# EAGLE board brick_i2c_rtc (EAGLE 7.4.0)
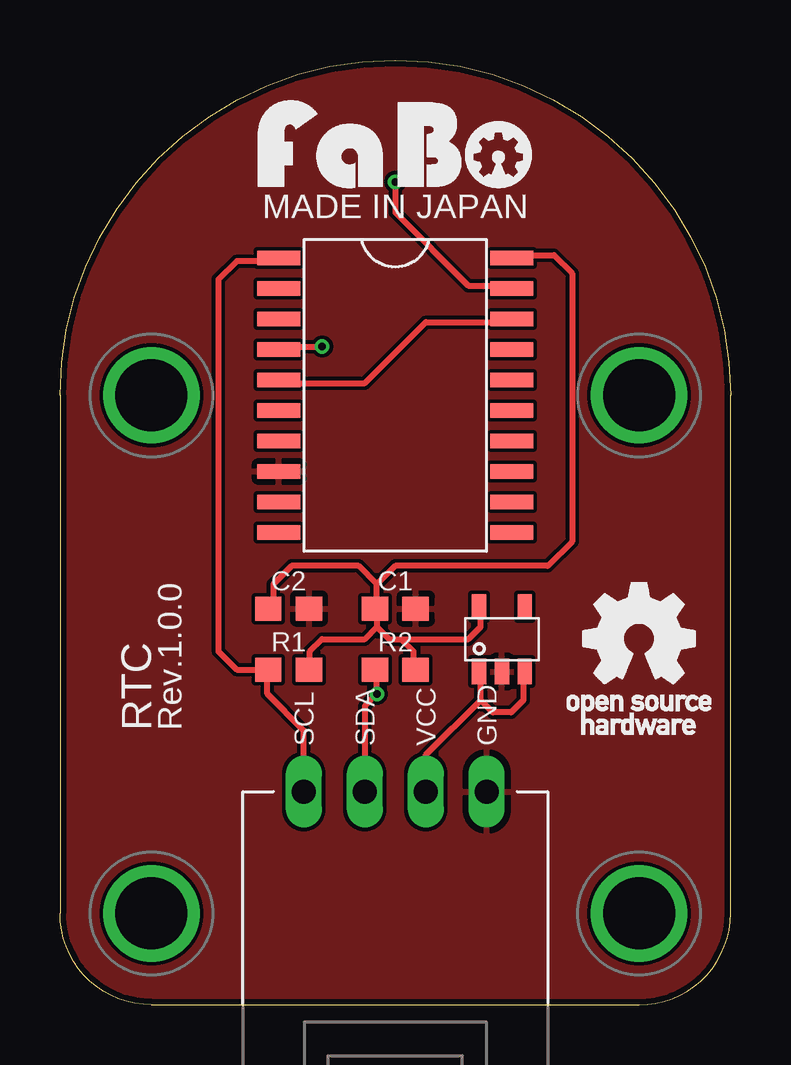
[diagram p0: board, top side]
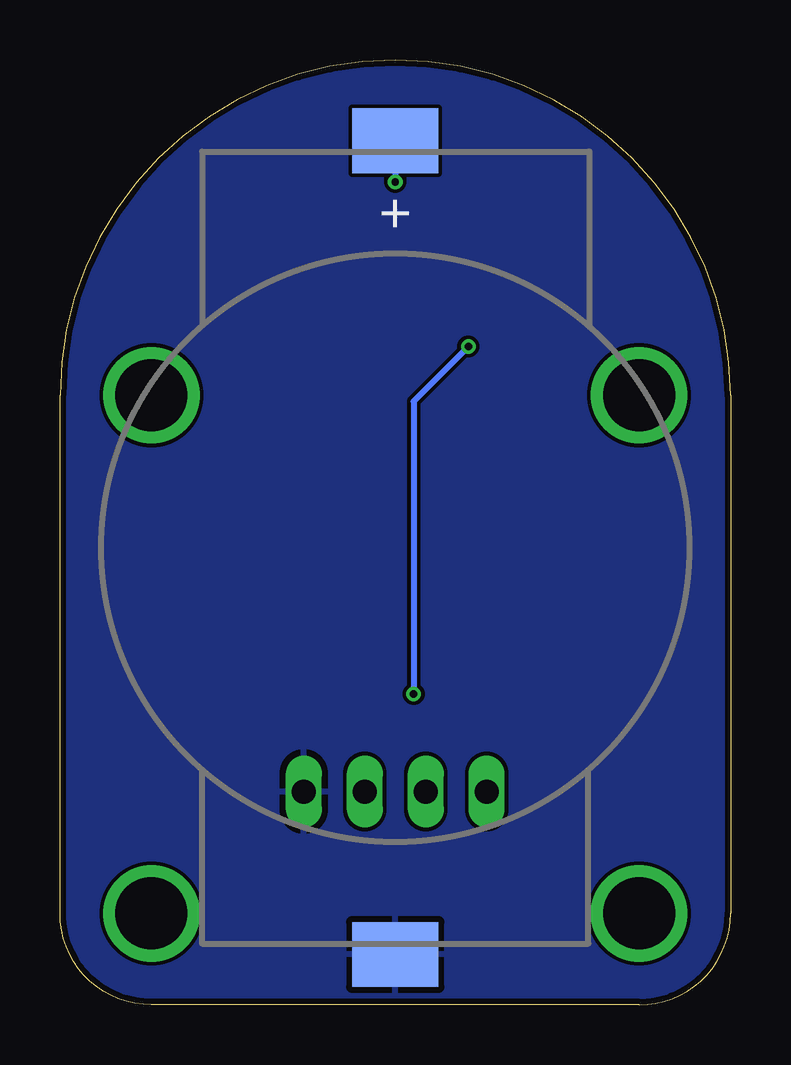
[diagram p1: board, bottom side, seen from below]

Size 27.94 x 39.37 mm. Coordinates in mm from the lower left corner, seen from the top.
Copper layers (1*16): Top 0.035mm / dielectric 1.5mm / Bottom 0.035mm
Design rules "Elecrow_2-layer_eagle_rule": minimum track width 6mil, minimum drill 12mil, track to track 6mil, track to pad 6mil, pad to pad 6mil, via to via 6mil, smd to smd 0mil, copper to edge 10mil, drill to drill 10mil, minimum pad ring 10mil, minimum via ring 6mil, stop-mask expansion 2mil, vias tented up to drill 100mil, thermal gap 10mil

## Footprints (pad centres in the part's own frame; a part is rotated, then mirrored left to right if it is on the bottom)
EIA0603 = smd 1.1 x 1: 1 -0.85,0; 2 0.85,0
SO20 = smd 1.8 x 0.6: 1 -4.85,5.715; 2 -4.85,4.445; 3 -4.85,3.175; 4 -4.85,1.905; 5 -4.85,0.635; 6 -4.85,-0.635; 7 -4.85,-1.905; 8 -4.85,-3.175; 9 -4.85,-4.445; 10 -4.85,-5.715; 11 4.85,-5.715; 12 4.85,-4.445; 13 4.85,-3.175; 14 4.85,-1.905; 15 4.85,-0.635; 16 4.85,0.635; 17 4.85,1.905; 18 4.85,3.175; 19 4.85,4.445; 20 4.85,5.715
TI-LP2985 = smd 0.6 x 1.05: 1 -0.95,-1.35; 2 0,-1.35; 3 0.95,-1.35; 4 0.95,1.35; 5 -0.95,1.35
FABO_BRICK_I2C = drill 1 long: GND 3.81,-10.16; SCL -3.81,-10.16; SDA -1.27,-10.16; VCC 1.27,-10.16 | drill 3 pad 3.81: P$1 -10.16,6.35; P$2 10.16,6.35; P$3 -10.16,-15.24; P$4 10.16,-15.24
TAKACHI-SMTU2450 = smd 2.7 x 3.6: 1 -16.95,0; 2 16.95,0

## Placement (x,y rotation side)
C1  1uF  [EIA0603]  13.97,16.51 0 top
C2  0.1uF  [EIA0603]  9.53,16.51 0 top
IC1  [SO20]  13.97,25.4 0 top
IC2  [TI-LP2985]  18.41,15.24 0 top
J1  [FABO_BRICK_I2C]  13.97,19.05 0 top
R1  4.7k  [EIA0603]  9.53,13.97 0 top
R2  4.7k  [EIA0603]  13.97,13.97 0 top
U$2  [LOGO_OSHW_T_M]  24.13,15.24 0 top
U$3  [LOGO_FABO_M]  13.97,34.04 0 top
U$4  [TAKACHI-SMTU2450]  13.97,19.05 270 bottom

## Library data of the parts
C1 C2 IC1 R1 R2 U$2 U$3 = FaBo-etc
IC2 = FaBo-Supply
J1 = FaBo-Template
U$4 = FaBo-Parts

## Nets
3V3: C1.1 C2.1 IC1.20 IC2.5 R1.2 R2.2
5V: IC2.1 IC2.3 J1.VCC
GND: C1.2 C2.2 IC1.8 IC2.2 J1.GND U$4.2
N$1: IC1.19 U$4.1
N$3: IC1.5 IC1.18
SCL: IC1.1 J1.SCL R1.1
SDA: IC1.4 J1.SDA R2.1

## Tracks (layer width: path | path; a pad name or v marks a point on that pad's centre or on a via)
3V3
  Top 0.254: IC1.20 18.92,31.11 19.05,31.24 20.57,31.24 21.34,30.48 21.34,19.3 20.32,18.29 13.97,18.29 13.21,17.53 | 13.21,16.76 13.21,16.6 C1.1 | C1.1 13.12,16.68 13.21,16.76 | 13.21,16.76 13.21,17.53 | 13.21,17.53 12.45,18.29 9.65,18.29 8.89,17.53 8.89,16.73 C2.1 | C1.1 13.21,16.51 13.21,15.75 | 13.21,15.75 13.72,15.24 14.22,15.24 | 14.22,15.24 17.02,15.24 17.53,15.75 17.53,16.53 IC2.5 | R2.2 14.82,14.14 14.73,14.22 14.73,14.73 14.22,15.24 | R1.2 10.38,14.19 10.41,14.22 10.41,14.73 10.92,15.24 12.7,15.24 13.21,15.75
5V
  Top 0.254: IC2.3 19.36,13.78 19.3,13.72 19.3,12.7 18.8,12.19 18.03,12.19 17.53,12.7 | 17.53,12.7 17.53,13.83 IC2.1 | J1.VCC 15.24,10.41 17.53,12.7
GND
  pour Bottom: -1.27,-1.27 29.21,-1.27 29.21,40.64 -1.27,40.64
  pour Top: -1.27,-1.27 29.21,-1.27 29.21,40.64 -1.27,40.64
N$1  (via drill 0.3)
  Top 0.254: v13.97,34.29 13.97,33.02 17.02,29.97 18.69,29.97 IC1.19
  Bottom 0.254: U$4.1 v13.97,34.29
N$3
  Top 0.254: IC1.5 9.12,25.93 9.14,25.91 12.7,25.91 15.24,28.45 18.69,28.45 IC1.18
SCL
  Top 0.254: IC1.1 9.02,31.11 8.89,30.99 7.37,30.99 6.6,30.23 6.6,14.73 7.37,13.97 R1.1 8.64,13.93 8.64,12.95 10.16,11.43 J1.SCL
SDA  (via drill 0.3)
  Top 0.254: IC1.4 9.12,27.41 9.14,27.43 v10.92,27.43 | R2.1 13.21,13.88 v13.21,12.95 12.7,12.45 J1.SDA
  Bottom 0.254: v10.92,27.43 13.21,25.15 v13.21,12.95

## Text on the board
tPlace: MADE IN JAPAN | RTC | Rev.1.0.0
bPlace: +